# Altium PCB ZD-STM32-ZOUYU(remove layoout).PcbDoc (part 8 of 8)
Units mm, origin at the board's own origin, x right, y up, seen from the top; angles counter-clockwise.
Board outline 251.84 x 139.06 mm, 2 copper layers (Top Layer, Bottom Layer); 253 components, 246 nets, 1172 pads, 599 vias.
Unrouted connection lines stored in the file: 47.
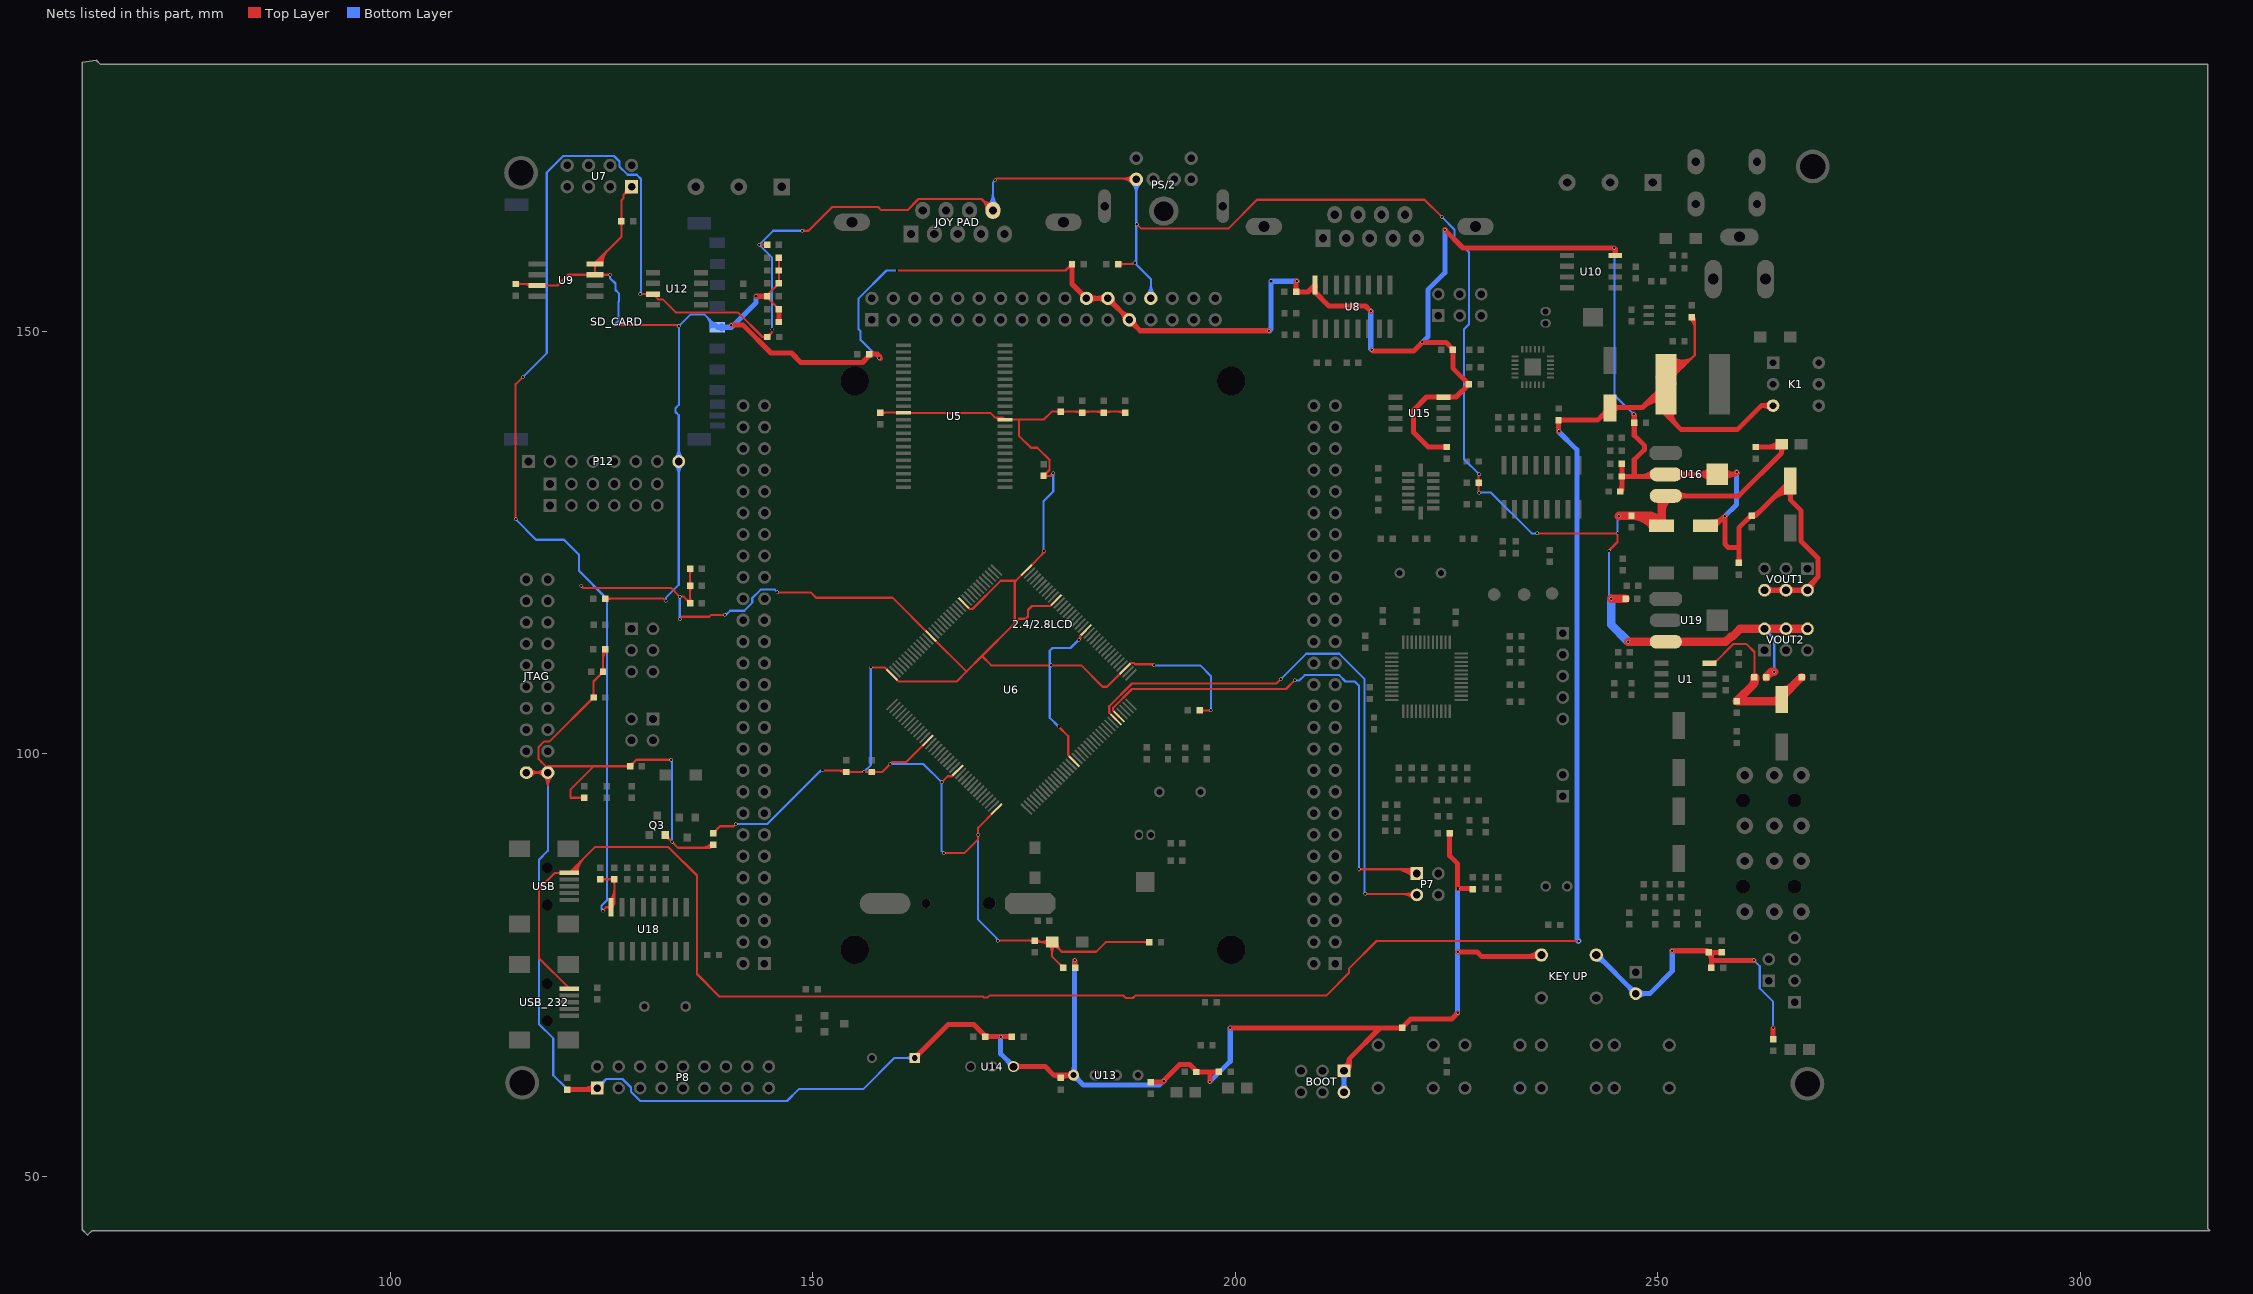
[diagram p8: the nets of this part, all layers, seen from the top]

## Via types
v1: diameter 0.4, hole 0.3, Top Layer to Bottom Layer, 598 vias
v2: diameter 0.3, hole 0.2, Top Layer to Bottom Layer, 1 vias

## Nets (pads, with @x,y where several pads share a name; then routed paths per layer and width w, separated by ;. In a path a pad name is that pad's centre, name@x,y a point inside that pad or via, vN(x,y) a via of type N, cw(c..) or ccw(c..) an arc to the next point about the centre after c; other vN are vias at no path point) (continued)
VCC3.3: 2.4/2.8LCD.22 2.4/2.8LCD.24 2.4/2.8LCD.25 "KEY UP.1" BEEP.1 BOOT.1 BOOT.2 C41.2 C43.1 C63.1 C64.1 C70.1 C71.1 C72.1 C73.2 C77.2 C78.2 C79.2 C80.2 C84.2 C85.1 D6.2 JTAG.1 JTAG.2 OLED.2 P8.1 P12.8 Q3.1 R14.2 R15.2 R16.2 R18.2 R32.2 R33.2 R34.1 R35.1 R36.1 R37.1 R38.1 R39.1 R43.2 R44.2 R46.2 R47.2 R49.1 R50.1 R51.1 R52.1 R53.1 R56.1 R57.2 R59.2 R61.2 R62.2 R63.2 R64.2 R68.1 SD_CARD.4 U7.2 U8.16 U9.3 U9.7 U9.8 U10.8 U13.1 U14.3 U15.8 U16.2 U16.4 VOUT1.2 VOUT1.4 VOUT1.6 | length 823.9
  Top Layer w0.254: C71.1@114.808,155.626 117.169,155.626 U9.3@117.348,155.446 119.759,155.446 121.031,156.718 U9.7@124.206,156.718 ; C71.1@114.988,155.446 cw(c115.421,155.013) 115.421,155.626 cw(c115.421,156.239) C71.1@114.988,155.805 ; 115.774,155.626 cw(c115.774,154.584) U9.3@116.511,155.321 ; JTAG.2@116.078,97.79 JTAG.1@118.618,97.79 118.357,98.051 118.357,98.559 117.729,99.187 ; JTAG.2@116.376,97.529 cw(c117.006,96.899) 117.006,97.79 cw(c117.006,98.681) JTAG.2@116.376,98.051 ; U9.3@116.388,155.626 cw(c116.388,155.197) U9.3@116.691,155.5 ; JTAG.2@116.556,97.349 cw(c117.619,96.286) 117.619,97.79 cw(c117.619,99.294) JTAG.2@116.556,98.231 ; 117.869,99.047 117.729,99.187 ; JTAG.1@118.14,97.349 ccw(c117.077,96.286) 117.077,97.79 ccw(c117.077,99.294) JTAG.1@118.14,98.231 ; JTAG.1@118.177,97.349 cw(c117.114,96.286) 118.618,96.286 cw(c120.122,96.286) JTAG.1@119.059,97.349 ; U9.3@118.185,155.321 cw(c118.488,155.017) 118.488,155.446 cw(c118.488,155.876) U9.3@118.185,155.572 ; JTAG.1@118.32,97.529 ccw(c117.69,96.899) 117.69,97.79 ccw(c117.69,98.681) JTAG.1@118.32,98.051 ; JTAG.1@118.357,97.529 cw(c117.727,96.899) 118.618,96.899 cw(c119.509,96.899) JTAG.1@118.879,97.529 ; 118.618,98.552 121.158,98.552 124.063,98.552 ; R56.1@122.756,94.639 ccw(c122.323,94.205) 122.323,94.818 ccw(c122.323,95.431) R56.1@122.756,94.998 ; R56.1@122.936,94.818 121.285,94.818 121.285,95.774 124.063,98.552 ; U9.7@123.369,156.592 ccw(c123.066,156.289) 123.066,156.718 ccw(c123.066,157.147) U9.7@123.369,156.844 ; R34.1@123.849,106.86 ccw(c123.415,107.293) 124.028,107.293 ccw(c124.641,107.293) R34.1@124.208,106.86 ; U9.7@124.08,156.844 ccw(c123.777,157.147) 124.206,157.147 ccw(c124.635,157.147) U9.7@124.332,156.844 ; U9.8@124.08,157.862 cw(c123.777,157.559) 124.206,157.559 cw(c124.635,157.559) U9.8@124.332,157.862 ; U9.8@124.333,157.988 cw(c124.946,157.988) 124.513,158.422 ; U9.8@124.587,157.988 cw(c125.813,157.988) 124.946,158.855 ; 124.691,109.243 ccw(c124.206,109.728) R35.1@124.892,109.728 ; 124.764,109.316 cw(c125.146,108.933) R35.1@125.146,109.474 ; U9.8@124.841,157.988 cw(c126.681,157.988) 125.38,159.289 ; R35.1@124.966,109.908 ccw(c124.533,110.341) 125.146,110.341 ccw(c125.759,110.341) R35.1@125.325,109.908 ; U9.7@125.043,156.592 cw(c125.346,156.289) 125.346,156.718 cw(c125.346,157.147) U9.7@125.043,156.844 ; U9.8@125.095,157.988 cw(c127.548,157.988) 125.813,159.722 ; 125.146,111.169 cw(c126.626,111.169) R36.1@125.579,112.215 ; 125.146,111.782 cw(c126.013,111.782) R36.1@125.4,112.395 125.146,112.141 R35.1@125.146,109.728 125.146,109.698 124.028,108.58 R34.1@124.028,106.68 118.832,101.484 118.212,101.484 117.504,100.776 117.504,99.412 117.729,99.187 ; R39.1@125.4,118.364 125.419,118.383 132.315,118.383 v1(132.588,118.11) ; R39.1@125.579,118.184 cw(c126.059,117.705) 126.059,118.383 ; R39.1@125.579,118.544 ccw(c125.967,118.931) 125.967,118.383 ; v1(125.984,156.718) U9.7@124.206,156.718 ; v1(126.492,150.775) 133.98,150.775 v1(134.131,150.624) ; C70.1@127.151,162.888 cw(c126.717,162.455) 127.33,162.455 cw(c127.943,162.455) C70.1@127.51,162.888 ; C70.1@127.151,163.248 ccw(c126.717,163.681) 127.33,163.681 ccw(c127.943,163.681) C70.1@127.51,163.248 ; U7.2@127.868,167.059 cw(c126.775,166.938) 127.552,166.16 ; U7.2@128.12,167.087 cw(c127.448,167.012) 127.926,166.534 cw(c128.404,166.056) U7.2@128.479,166.728 ; R68.1@128.167,98.372 ccw(c127.733,97.939) 127.733,98.552 ccw(c127.733,99.165) R68.1@128.167,98.732 ; R68.1@128.346,98.806 ccw(c128.346,99.419) 128.78,98.986 ccw(c129.213,98.552) R68.1@128.6,98.552 ; U7.2@128.451,166.476 ccw(c128.33,165.383) 127.552,166.16 ; U7.2@128.524,167.132 127.552,166.16 ; Q3.1@132.522,90.044 cw(c132.522,89.204) 133.116,89.798 ; Q3.1@132.522,90.392 v1(133.334,89.58) 134.014,88.9 137.846,88.9 R38.1@138.176,89.23 cw(c137.379,90.027) 137.379,88.9 ; Q3.1@132.845,90.367 ccw(c133.564,90.367) 133.056,89.858 ; v1(133.223,99.314) 129.108,99.314 R68.1@128.346,98.552 124.063,98.552 ; 133.591,150.775 cw(c133.591,150.084) v1@134.079,150.573 ; 136.766,88.9 ccw(c136.766,90.641) R38.1@137.996,89.41 ; R50.1@145.974,152.654 144.589,154.038 144.589,154.318 R51.1@145.974,155.702 R52.1@145.974,157.226 R53.1@145.974,158.75 ; v1(159.893,157.226) 179.894,157.226 C41.2@180.657,157.99 ; C41.2@180.403,157.99 cw(c179.79,157.99) 180.224,157.556 cw(c180.657,157.122) C41.2@180.657,157.736 ; U9.7@124.206,156.718 U9.8@124.206,157.988 124.206,158.115 127.33,161.239 C70.1@127.33,163.068 127.33,165.55 127.552,165.772 127.552,166.16
  Top Layer w0.6: C63.1@120.904,60.274 124.282,60.274 P8.1@124.46,60.452 ; 122.944,60.274 ccw(c122.944,61.968) P8.1@124.142,60.77 ; v1(140.335,150.749) 141.736,150.749 145.038,147.447 147.447,147.447 148.549,146.345 155.851,146.345 156.642,147.136 C43.1@156.642,147.32 157.607,147.32 157.861,147.066 ; v1(143.256,154.178) 144.588,154.178 C73.2@144.589,154.18 ; R49.1@145.974,151.13 R50.1@145.974,152.654 ; 156.373,146.867 ccw(c155.92,147.32) C43.1@156.561,147.32 ; 157.852,147.075 cw(c157.589,146.812) v1@157.961,146.812 ; BEEP.1@162.052,64.008 165.997,67.953 169.05,67.953 170.37,66.633 R63.2@170.37,66.546 v1(172.212,66.546) 173.542,66.546 C80.2@173.546,66.55 ; BEEP.1@162.052,64.308 ccw(c162.052,65.032) 162.564,64.52 ccw(c163.076,64.008) BEEP.1@162.352,64.008 ; U14.3@173.736,62.992 177.484,62.992 178.5,61.976 ; U14.3@173.983,62.745 cw(c174.581,62.147) 174.581,62.992 cw(c174.581,63.837) U14.3@173.983,63.239 ; C78.2@179.262,61.608 ccw(c178.5,61.003) 178.5,61.976 ; C78.2@179.383,61.601 cw(c180.288,60.696) U13.1@180.288,61.976 ; U13.1@180.601,61.729 ccw(c180.003,61.131) 180.003,61.976 ccw(c180.003,62.821) U13.1@180.601,62.223 ; C41.2@180.657,157.99 180.657,155.638 2.4/2.8LCD.22@182.372,153.924 2.4/2.8LCD.24@184.912,153.924 2.4/2.8LCD.25@187.452,151.384 188.739,150.097 203.945,150.097 v1(203.962,150.114) ; U13.1@180.848,61.976 178.5,61.976 ; v1(180.975,75.565) 181.026,75.514 R37.1@181.026,74.676 ; 2.4/2.8LCD.22@182.717,153.579 cw(c183.549,152.747) 183.549,153.924 cw(c183.549,155.101) 2.4/2.8LCD.22@182.717,154.269 ; 2.4/2.8LCD.24@184.567,153.579 ccw(c183.735,152.747) 183.735,153.924 ccw(c183.735,155.101) 2.4/2.8LCD.24@184.567,154.269 ; 2.4/2.8LCD.24@184.912,153.437 cw(c184.912,152.26) 185.744,153.092 cw(c186.576,153.924) 2.4/2.8LCD.24@185.399,153.924 ; 2.4/2.8LCD.25@186.965,151.384 ccw(c185.788,151.384) 186.62,152.216 ccw(c187.452,153.048) 2.4/2.8LCD.25@187.452,151.871 ; 2.4/2.8LCD.25@187.452,150.897 cw(c187.452,149.72) 188.284,150.552 cw(c189.116,151.384) 2.4/2.8LCD.25@187.939,151.384 ; R57.2@189.994,61.151 191.326,61.151 v1(191.516,61.341) 193.413,63.238 194.593,63.238 195.389,62.442 R43.2@195.389,62.355 196.85,62.355 ; 191.298,61.151 ccw(c191.298,61.559) v1@191.587,61.27 ; v1(196.977,61.214) 196.977,62.228 196.85,62.355 ; R44.2@198.056,62.359 198.053,62.355 196.85,62.355 ; v1@199.39,67.564 v1(199.392,67.566) 217.129,67.566 ; v1(207.264,155.956) 207.188,155.88 C64.1@207.188,154.686 208.601,154.686 U8.16@209.423,155.508 209.423,154.671 211.059,153.035 215.392,153.035 v1(216.027,152.4) ; 209.073,155.158 cw(c209.434,154.797) U8.16@209.495,155.304 ; BOOT.1@212.728,62.917 ccw(c212.439,63.924) 213.487,63.924 ; BOOT.1@212.852,62.484 213.487,63.119 213.487,63.924 ; BOOT.1@212.893,62.34 ccw(c212.668,63.128) BOOT.1@213.487,63.128 ; v1(216.154,147.828) 216.281,147.701 221.107,147.701 v1(222.115,148.709) 224.946,148.709 225.742,147.913 R62.2@225.742,147.826 225.742,145.671 R18.2@227.647,143.766 226.122,142.24 U15.8@224.648,142.24 222.631,142.24 221.107,140.716 221.107,138.049 222.821,136.334 R61.2@225.046,136.334 ; v1(224.79,162.052) 226.949,159.893 v1(244.856,159.893) ; R64.2@225.361,90.6 225.361,87.947 226.314,86.995 v1(226.314,84.074) 228.027,84.074 R33.2@228.09,84.01 ; v1(226.314,69.342) 225.573,68.601 220.726,68.601 219.773,67.649 R32.2@219.773,67.566 217.129,67.566 ; v1(226.314,76.581) 228.6,76.581 229.173,76.008 236.028,76.008 236.22,76.2 ; 234.58,76.008 ccw(c234.58,77.84) 235.875,76.545 ; 242.72,76.2 242.824,76.2 ; U10.8@244.968,159.004 v1@244.968,159.781 ; R16.2@245.497,131.12 ccw(c244.899,131.718) 245.745,131.718 ; R16.2@245.554,131.062 245.745,131.253 R15.2@245.745,132.842 ; R14.2@245.745,134.366 R15.2@245.745,132.842 ; v1(247.142,140.208) 247.218,140.132 C72.1@247.218,139.192 247.218,137.717 248.404,136.531 248.404,136.011 247.218,134.825 247.218,132.893 247.269,132.842 ; 247.991,132.842 ccw(c247.991,134.975) U16.2@249.499,133.467 ; v1(251.714,76.708) 255.84,76.708 R47.2@256.03,76.517 ; U16.2@252.401,132.724 cw(c253.299,131.827) 253.299,133.095 cw(c253.299,134.364) U16.2@252.401,133.467 ; 255.375,76.708 cw(c255.375,75.862) R47.2@255.973,76.46 ; D6.2@255.651,127 256.794,127 v1(257.937,128.143) 257.937,124.841 258.318,124.46 259.59,124.46 ; R47.2@255.977,76.457 cw(c255.252,75.633) 256.349,75.633 ; R59.2@256.349,74.678 256.349,75.692 ; U16.4@256.361,132.409 ccw(c254.705,130.753) 254.705,133.095 ccw(c254.705,135.437) U16.4@256.361,133.781 ; D6.2@256.401,127.45 ccw(c256.401,129.485) v1@257.84,128.046 ; C77.2@257.554,76.517 R47.2@256.03,76.517 ; U16.4@257.8,132.485 cw(c259.079,131.45) 259.079,133.095 ; U16.4@257.8,133.705 ccw(c259.079,134.74) 259.079,133.095 ; 258.96,133.095 ccw(c258.96,133.724) v1@259.405,133.279 ; v1(259.334,133.35) 259.079,133.095 ; C79.2@259.59,122.618 259.59,124.46 ; C84.2@261.114,128.288 ccw(c261.114,129.552) 262.008,128.658 ; v1(261.366,75.565) 256.476,75.565 256.349,75.692 ; VOUT1.6@262.636,119.38 VOUT1.4@265.176,119.38 VOUT1.2@267.716,119.38 267.716,119.713 268.966,120.963 268.966,123.17 266.934,125.202 266.934,128.84 265.684,130.09 C85.1@265.684,132.334 261.556,128.207 C84.2@261.114,128.207 261.027,128.207 259.59,126.769 259.59,124.46 ; VOUT1.6@262.954,119.062 cw(c263.722,118.294) 263.722,119.38 cw(c263.722,120.466) VOUT1.6@262.954,119.698 ; 263.465,130.115 cw(c265.684,127.896) C85.1@265.684,131.034 ; v1(263.652,67.564) 263.652,66.232 R46.2@263.654,66.23 ; 264.489,131.139 cw(c265.684,129.944) C85.1@265.684,131.634 ; VOUT1.4@264.858,119.062 ccw(c264.09,118.294) 264.09,119.38 ccw(c264.09,120.466) VOUT1.4@264.858,119.698 ; C85.1@265.366,131.166 cw(c264.598,130.398) 265.684,130.398 cw(c266.77,130.398) C85.1@266.002,131.166 ; VOUT1.4@265.494,119.062 cw(c266.262,118.294) 266.262,119.38 cw(c266.262,120.466) VOUT1.4@265.494,119.698 ; VOUT1.2@267.398,119.062 ccw(c266.63,118.294) 266.63,119.38 ccw(c266.63,120.466) VOUT1.2@267.398,119.698 ; VOUT1.2@268.166,119.38 cw(c270.056,119.38) 268.72,120.716 ; 213.487,63.924 217.129,67.566 ; R15.2@245.745,132.842 247.269,132.842 ; 247.269,132.842 250.697,132.842 U16.2@250.95,133.095 U16.4@257.046,133.095 259.079,133.095 ; R47.2@256.03,76.517 256.349,76.198 256.349,75.692
  Bottom Layer w0.254: JTAG.1@118.177,97.349 cw(c117.114,96.286) 118.618,96.286 cw(c120.122,96.286) JTAG.1@119.059,97.349 ; JTAG.1@118.357,97.529 cw(c117.727,96.899) 118.618,96.899 cw(c119.509,96.899) JTAG.1@118.879,97.529 ; JTAG.1@118.618,97.79 118.618,88.536 117.572,87.49 117.572,68.014 119.253,66.333 119.253,61.976 120.777,60.452 P8.1@124.46,60.452 125.537,61.529 127.446,61.529 128.463,60.512 128.463,60.006 129.548,58.921 146.932,58.921 148.336,60.325 155.956,60.325 159.639,64.008 BEEP.1@162.052,64.008 ; P8.1@124.019,60.011 ccw(c122.956,58.948) 122.956,60.452 ccw(c122.956,61.956) P8.1@124.019,60.893 ; P8.1@124.199,60.191 ccw(c123.569,59.561) 123.569,60.452 ccw(c123.569,61.343) P8.1@124.199,60.713 ; P8.1@124.46,60.821 ccw(c124.46,61.712) 125.09,61.082 ccw(c125.72,60.452) P8.1@124.829,60.452 ; P8.1@124.46,61.075 ccw(c124.46,62.579) 125.524,61.516 ccw(c126.587,60.452) P8.1@125.083,60.452 ; v1(125.984,156.718) 125.984,156.32 126.619,155.685 126.619,154.923 127.019,154.523 127.019,153.552 126.974,153.507 126.974,151.257 v1(126.492,150.775) v1@126.492,150.749 ; v1(132.588,118.11) 132.588,118.491 134.112,120.015 P12.8@134.112,134.62 134.112,140.098 133.731,140.479 133.731,140.915 134.131,141.315 v1(134.131,150.624) 135.545,152.038 137.142,152.038 SD_CARD.4@138.43,150.75 ; v1@133.171,99.262 cw(c132.778,98.869) 133.334,98.869 ; v1(133.223,99.314) 133.334,99.203 v1(133.334,89.58) ; P12.8@133.671,134.179 cw(c132.608,133.116) 134.112,133.116 cw(c135.616,133.116) P12.8@134.553,134.179 ; P12.8@133.671,135.061 ccw(c132.608,136.124) 134.112,136.124 ccw(c135.616,136.124) P12.8@134.553,135.061 ; P12.8@133.851,134.359 cw(c133.221,133.729) 134.112,133.729 cw(c135.003,133.729) P12.8@134.373,134.359 ; P12.8@133.851,134.881 ccw(c133.221,135.511) 134.112,135.511 ccw(c135.003,135.511) P12.8@134.373,134.881 ; 137.355,151.825 cw(c136.036,150.505) SD_CARD.4@137.902,150.505 ; 137.789,151.391 cw(c136.903,150.505) SD_CARD.4@138.156,150.505 ; SD_CARD.4@138.079,151.1 ccw(c138.375,151.396) SD_CARD.4@138.375,150.978 ; v1(157.861,146.812) 155.613,149.06 155.613,150.064 155.404,150.273 155.404,153.932 158.698,157.226 v1(159.893,157.226) ; BEEP.1@161.718,63.674 ccw(c160.91,62.866) 160.91,64.008 ccw(c160.91,65.15) BEEP.1@161.718,64.342 ; v1(244.856,159.893) 244.856,142.494 v1(247.142,140.208) ; v1(261.366,75.565) 262.067,74.864 262.067,72.267 263.652,70.682 v1(263.652,67.564)
  Bottom Layer w0.6: SD_CARD.4@138.43,150.75 SD_CARD.4@138.675,150.505 140.345,150.505 143.256,153.416 143.256,153.924 ; SD_CARD.4@139.187,150.293 cw(c139.699,149.781) 139.699,150.505 cw(c139.699,151.229) SD_CARD.4@139.187,150.717 ; 139.987,150.505 ccw(c139.987,151.097) v1@140.406,150.678 ; v1@140.335,150.649 ccw(c140.335,151.021) 140.598,150.758 ; v1(172.212,66.546) 172.212,64.516 U14.3@173.736,62.992 ; U14.3@173.386,62.992 ccw(c172.541,62.992) 173.139,63.589 ccw(c173.736,64.187) U14.3@173.736,63.342 ; U13.1@180.601,62.223 ccw(c179.696,63.128) 180.975,63.128 ; U13.1@180.848,61.626 cw(c180.848,60.781) 181.445,61.379 cw(c182.043,61.976) U13.1@181.198,61.976 ; v1(180.975,75.565) 180.975,62.103 U13.1@180.848,61.976 181.998,60.826 191.001,60.826 v1(191.516,61.341) ; v1(196.977,61.214) 199.392,63.629 v1(199.392,67.566) ; v1(203.962,150.114) 204.216,150.368 v1(204.216,155.956) v1(207.264,155.956) ; v1@204.033,150.043 ccw(c203.59,150.486) 204.216,150.486 ; BOOT.2@212.534,60.262 ccw(c211.766,61.03) 212.852,61.03 ccw(c213.938,61.03) BOOT.2@213.17,60.262 ; BOOT.1@212.534,62.166 cw(c211.766,61.398) 212.852,61.398 cw(c213.938,61.398) BOOT.1@213.17,62.166 ; BOOT.2@212.852,59.944 BOOT.1@212.852,62.484 ; v1(216.027,152.4) 216.027,147.955 v1(216.154,147.828) ; v1(222.115,148.709) 222.778,149.372 222.778,154.95 224.79,156.962 v1(224.79,162.052) ; v1@226.187,69.215 v1(226.314,69.342) v1(226.314,76.581) v1(226.314,84.074) ; 242.72,75.713 cw(c242.72,74.285) 243.73,75.294 ; 242.824,76.2 OLED.2@247.396,71.628 249.047,71.628 251.714,74.295 v1(251.714,76.708) ; 243.207,76.2 ccw(c244.133,76.2) 243.479,75.545 ; OLED.2@246.946,71.628 ccw(c245.86,71.628) 246.628,72.396 ccw(c247.396,73.164) OLED.2@247.396,72.078 ; OLED.2@247.714,71.31 cw(c248.482,70.542) 248.482,71.628 cw(c248.482,72.714) OLED.2@247.714,71.946 ; v1(257.937,128.143) 259.334,129.54 v1(259.334,133.35)
VCC3.3M: C39.2 C40.2 C52.1 C53.1 C54.1 C55.1 C56.1 C57.1 C58.1 C59.1 C60.1 C61.1 C62.1 D1.1 R30.2 R37.2 R38.2 U5.11 U5.33 U6.17 U6.39 U6.52 U6.62 U6.72 U6.84 U6.95 U6.108 U6.121 U6.131 U6.144 | length 353.7
  Top Layer w0.254: v1(122.555,119.888) 122.802,119.641 133.216,119.641 v1(134.239,118.618) 134.696,118.618 C60.1@135.458,117.856 C62.1@135.458,119.888 C61.1@135.458,121.92 ; v1(134.239,115.951) 134.526,116.238 137.735,116.238 137.956,116.459 v1(139.573,116.459) ; C60.1@135.204,117.856 ccw(c134.591,117.856) 135.025,118.29 ccw(c135.458,118.723) C60.1@135.458,118.11 ; C60.1@135.279,118.036 ccw(c134.845,118.469) 135.458,118.469 ccw(c136.071,118.469) C60.1@135.638,118.036 ; C62.1@135.279,119.708 cw(c134.845,119.275) 135.458,119.275 cw(c136.071,119.275) C62.1@135.638,119.708 ; C62.1@135.279,120.068 ccw(c134.845,120.501) 135.458,120.501 ccw(c136.071,120.501) C62.1@135.638,120.068 ; C61.1@135.279,121.74 cw(c134.845,121.307) 135.458,121.307 cw(c136.071,121.307) C61.1@135.638,121.74 ; R38.2@138.178,90.614 139.003,91.44 140.589,91.44 v1(140.843,91.694) ; R38.2@138.178,90.868 ccw(c138.178,91.482) 138.611,91.048 ccw(c139.045,90.614) R38.2@138.432,90.614 ; v1(145.796,119.126) 149.733,119.126 150.368,118.491 159.432,118.491 U6.95@163.952,113.971 168.14,109.783 168.203,109.783 ; v1(151.13,98.044) 153.746,98.044 C53.1@153.924,97.866 ; 152.882,98.044 cw(c152.882,96.824) C53.1@153.744,97.687 ; 153.495,98.044 cw(c153.495,97.437) C53.1@153.924,97.866 ; C53.1@154.104,97.687 cw(c154.537,97.253) 154.537,97.866 cw(c154.537,98.479) C53.1@154.104,98.046 ; 155.784,97.866 ccw(c155.784,98.216) v1@156.031,97.969 ; v1@156.135,97.969 ccw(c156.382,98.216) 156.382,97.866 ; C52.1@156.792,97.687 ccw(c156.359,97.253) 156.359,97.866 ccw(c156.359,98.479) C52.1@156.792,98.046 ; v1(156.845,110.236) 158.495,110.236 U6.108@159.356,109.375 160.165,108.566 166.986,108.566 168.203,109.783 ; C52.1@157.152,97.687 cw(c157.585,97.253) 157.585,97.866 cw(c157.585,98.479) C52.1@157.152,98.046 ; C39.2@157.99,140.398 160.702,140.398 U5.33@160.729,140.371 170.975,140.371 171.502,139.844 ; C39.2@158.169,140.219 cw(c158.603,139.785) 158.603,140.398 cw(c158.603,141.012) C39.2@158.169,140.578 ; 159.787,140.398 cw(c159.787,140.13) U5.33@159.977,140.32 ; U6.121@163.599,101.597 161.062,99.06 159.385,99.06 v1(159.131,98.806) 158.191,97.866 C52.1@156.972,97.866 C53.1@153.924,97.866 ; v1(165.227,96.647) 165.942,97.362 166.435,97.362 U6.131@167.134,98.061 ; v1(165.481,88.265) 167.894,88.265 169.545,89.916 v1(169.545,90.424) 169.545,91.28 U6.144@171.73,93.465 ; U6.84@167.841,117.86 168.541,117.161 168.877,117.161 172.221,120.505 174.022,120.505 ; v1(171.882,77.902) C54.1@176.276,77.902 ; 171.889,139.844 cw(c171.889,139.511) U5.11@172.195,139.643 ; U5.11@171.962,139.542 ccw(c171.502,139.343) 171.502,139.844 ; 172.276,139.844 cw(c172.276,139.678) U5.11@172.428,139.744 ; C54.1@176.096,77.722 ccw(c175.663,77.289) 175.663,77.902 ccw(c175.663,78.515) C54.1@176.096,78.081 ; C54.1@176.456,78.081 ccw(c177.318,78.944) 177.318,77.724 ; 176.705,77.724 cw(c176.705,78.331) C54.1@176.276,77.902 ; 176.953,123.436 ccw(c176.31,124.079) v1@177.219,124.079 ; R30.2@177.29,133.16 ccw(c177.29,133.773) 177.724,133.339 ccw(c178.158,132.905) R30.2@177.544,132.905 ; 177.386,123.87 ccw(c177.177,124.079) v1@177.473,124.079 ; 177.444,123.927 U6.72@175.266,121.749 174.022,120.505 ; R30.2@177.47,132.726 cw(c177.904,132.292) 177.904,132.905 cw(c177.904,133.519) R30.2@177.47,133.085 ; D1.1@177.838,77.354 ccw(c176.945,76.461) 176.945,77.724 ccw(c176.945,78.987) D1.1@177.838,78.094 ; D1.1@177.938,77.354 cw(c177.045,76.461) 178.308,76.461 cw(c179.571,76.461) D1.1@178.678,77.354 ; D1.1@178.408,77.201 cw(c178.408,76.18) 179.13,76.902 ; v1(178.435,133.223) 178.118,132.905 R30.2@177.29,132.905 178,133.615 178,134.806 176.554,136.252 175.804,136.252 174.371,137.685 174.371,139.571 ; D1.1@178.677,77.724 ccw(c179.568,77.724) D1.1@178.938,77.094 ; U6.62@178.801,118.214 178.102,117.514 175.934,117.514 175.46,117.04 175.46,116.271 175.194,116.005 174.425,116.005 173.882,115.462 ; D1.1@178.931,77.724 ccw(c180.435,77.724) 179.372,76.66 ; v1@179.07,103.378 v1(179.07,103.251) 180.213,102.108 180.213,100.2 180.223,100.19 180.223,99.887 180.923,99.187 U6.17@180.923,99.122 ; C40.2@179.143,140.346 ccw(c178.709,139.912) 178.709,140.525 ccw(c178.709,141.139) C40.2@179.143,140.705 ; R37.2@179.387,74.678 ccw(c178.774,74.678) 179.208,75.111 ccw(c179.641,75.545) R37.2@179.641,74.932 ; C40.2@179.502,140.346 cw(c179.936,139.912) 179.936,140.525 cw(c179.936,141.139) C40.2@179.502,140.705 ; R37.2@179.641,74.678 178.308,76.011 D1.1@178.308,77.724 ; 180.975,140.525 cw(c180.975,139.522) C59.1@181.684,140.232 ; v1@181.441,113.597 ccw(c181.17,113.979) 181.637,113.979 ; v1(181.483,113.538) 181.637,113.692 181.637,113.979 ; 181.637,113.915 cw(c181.867,113.915) U6.52@181.79,114.132 ; C59.1@182.044,140.232 cw(c182.753,139.522) 182.753,140.525 ; U6.52@182.337,114.678 181.637,113.979 ; 183.515,140.525 cw(c183.515,139.522) C58.1@184.224,140.232 ; C58.1@184.584,140.232 cw(c185.293,139.522) 185.293,140.525 ; 186.055,140.525 cw(c186.055,139.522) C57.1@186.764,140.232 ; C57.1@186.944,140.411 186.83,140.525 184.404,140.525 C40.2@179.322,140.525 178.244,140.525 177.29,139.571 174.371,139.571 ; C55.1@189.635,77.544 ccw(c189.201,77.111) 189.201,77.724 ccw(c189.201,78.337) C55.1@189.635,77.904 ; C55.1@189.814,77.724 184.658,77.724 183.515,76.581 179.451,76.581 D1.1@178.308,77.724 ; 189.89,110.617 cw(c189.89,110.007) v1@190.321,110.438 ; v1(190.373,110.49) 190.246,110.617 188.134,110.617 187.969,110.782 187.698,110.782 186.998,110.082 U6.39@186.933,110.082 184.801,107.95 184.277,107.95 181.737,110.49 v1(178.181,110.49) 171.101,110.49 170.005,111.585 ; C56.1@195.758,105.156 v1(197.104,105.156) ; C56.1@195.937,104.976 cw(c196.371,104.543) 196.371,105.156 cw(c196.371,105.769) C56.1@195.937,105.336 ; 168.203,109.783 170.005,111.585 ; 170.005,111.585 173.882,115.462 ; 171.502,139.844 172.456,139.844 U5.11@172.729,139.571 174.371,139.571 ; 173.882,115.462 173.882,120.365 174.022,120.505 ; C54.1@176.276,77.902 176.454,77.724 D1.1@178.308,77.724
  Bottom Layer w0.254: v1(134.239,115.951) v1(134.239,118.618) ; v1(139.573,116.459) 139.7,116.459 140.19,116.949 141.857,116.949 142.821,117.913 142.821,118.453 143.821,119.453 145.469,119.453 v1(145.796,119.126) ; v1@139.573,116.532 ccw(c139.573,117.015) 139.914,116.673 ; v1(140.843,91.694) 144.556,91.694 150.906,98.044 v1(151.13,98.044) ; 150.624,97.761 cw(c151.13,97.255) v1@151.13,97.971 ; v1(156.083,97.917) 156.845,98.679 v1(156.845,110.236) ; v1(159.131,98.806) 163.068,98.806 v1(165.227,96.647) 165.227,88.519 v1(165.481,88.265) ; v1(169.545,90.424) 169.545,80.391 171.882,78.054 v1(171.882,77.902) ; 171.649,78.287 cw(c171.265,77.902) v1@171.809,77.902 ; v1(177.292,124.079) 177.292,129.921 178.435,131.064 v1(178.435,133.223) ; 178.035,109.961 cw(c178.71,109.961) v1@178.233,110.438 ; 178.035,111.019 ccw(c178.71,111.019) v1@178.233,110.542 ; v1(179.07,103.251) 178.035,104.286 178.035,112.232 178.344,112.541 180.486,112.541 v1(181.483,113.538) ; v1(190.373,110.49) 195.834,110.49 197.104,109.22 v1(197.104,105.156)
VCC5: 2.4/2.8LCD.28 "JOY PAD.9" C42.2 C68.2 C76.1 C86.2 C91.1 C92.1 C95.2 C97.2 D5.2 F1.1 PS/2.4 R3.2 R7.2 U12.3 U16.3 U18.16 U19.3 VOUT2.2 VOUT2.4 VOUT2.6 | length 444.4
  Top Layer w0.254: v1(114.808,127.762) 114.808,133.54 114.801,133.547 114.801,143.757 v1(115.644,144.6) ; C91.1@124.841,85.166 C92.1@126.492,85.166 126.492,82.229 U18.16@126.111,81.848 125.536,81.848 v1(125.095,81.407) ; C91.1@125.021,84.987 cw(c125.454,84.553) 125.454,85.166 cw(c125.454,85.779) C91.1@125.021,85.346 ; U18.16@125.989,81.726 ccw(c125.693,81.43) 125.693,81.848 ccw(c125.693,82.266) U18.16@125.989,81.97 ; U18.16@125.989,82.77 ccw(c124.774,83.985) 126.492,83.985 ; U18.16@126.111,82.021 ccw(c126.111,82.439) 126.406,82.143 ccw(c126.702,81.848) U18.16@126.284,81.848 ; U18.16@126.168,82.591 ccw(c125.387,83.372) 126.492,83.372 ; C92.1@126.312,85.346 cw(c125.879,85.779) 125.879,85.166 cw(c125.879,84.553) 126.312,84.987 cw(c125.879,84.553) 126.492,84.553 cw(c127.105,84.553) C92.1@126.672,84.987 ; U18.16@126.348,82.411 ccw(c126,82.759) 126.492,82.759 ; v1(129.54,154.432) U12.3@131.064,154.432 131.69,153.806 132.216,153.806 133.75,152.273 141.099,152.273 144.02,149.352 ; U12.3@130.421,154.297 ccw(c130.096,153.972) 130.096,154.432 ccw(c130.096,154.892) U12.3@130.421,154.567 ; v1(143.637,160.274) 143.639,160.276 C68.2@144.589,160.276 ; C68.2@144.41,160.096 ccw(c143.976,159.662) 143.976,160.276 ccw(c143.976,160.889) C68.2@144.41,160.455 ; C76.1@144.416,149.179 ccw(c144.02,148.811) 144.02,149.352 ; C76.1@144.416,149.525 cw(c144.02,149.893) 144.02,149.352 ; C76.1@144.602,149.606 ccw(c144.602,150.219) 145.036,149.786 ccw(c145.469,149.352) C76.1@144.856,149.352 ; v1(145.161,150.241) 145.161,149.911 C76.1@144.602,149.352 144.02,149.352 ; v1(148.717,161.925) 149.479,161.925 152.292,164.738 157.725,164.738 158.09,164.373 161.18,164.373 162.488,165.681 169.955,165.681 171.298,164.338 ; 170.018,165.617 ccw(c171.008,166.607) 171.195,165.22 ; 170.087,165.549 cw(c169.003,164.465) 170.536,164.465 ; 170.381,165.255 ccw(c171.094,165.968) 171.23,164.968 ; 170.52,165.115 cw(c169.87,164.465) 170.79,164.465 ; v1(171.577,167.894) 171.81,168.127 188.151,168.127 PS/2.4@188.266,168.012 ; C42.2@186.118,157.986 187.958,157.986 v1(188.087,158.115) ; C42.2@186.298,157.807 cw(c186.732,157.373) 186.732,157.986 cw(c186.732,158.6) C42.2@186.298,158.166 ; 186.364,168.127 cw(c186.364,166.11) PS/2.4@187.79,167.536 ; 186.919,168.127 ccw(c186.919,169.359) PS/2.4@187.79,168.488 ; 186.977,168.127 cw(c186.977,166.723) PS/2.4@187.97,167.716 ; 187.6,157.986 ccw(c187.6,158.602) v1@188.035,158.167 ; v1(188.341,162.687) 188.843,162.185 199.142,162.185 202.565,165.608 222.377,165.608 v1(224.409,163.576) ; R3.2@228.611,131.899 cw(c228.177,131.465) 228.79,131.465 cw(c229.404,131.465) R3.2@228.97,131.899 ; R3.2@228.611,132.258 ccw(c228.177,132.692) 228.79,132.692 ccw(c229.404,132.692) R3.2@228.97,132.258 ; 228.79,131.267 ccw(c229.184,131.267) v1@228.906,130.989 ; 228.79,132.766 cw(c229.184,132.766) v1@228.906,133.044 ; v1@228.79,133.032 R3.2@228.79,132.078 228.79,131 v1(228.854,130.937) ; v1(235.712,126.111) v1(245.237,126.111) 245.237,125.095 v1(244.221,124.079)
  Top Layer w0.6: U16.3@250.95,130.555 259.587,130.555 264.668,135.636 F1.1@264.668,136.652 264.351,136.334 C97.2@261.622,136.334 ; U16.3@252.401,130.184 cw(c253.299,129.287) 253.299,130.555 cw(c253.299,131.824) U16.3@252.401,130.927 ; 262.966,136.334 ccw(c262.966,138.227) F1.1@264.304,136.889 ; F1.1@264.431,136.415 cw(c263.859,135.843) 264.668,135.843 cw(c265.477,135.843) F1.1@264.905,136.415
  Top Layer w1: v1(244.475,118.364) 244.477,118.366 C95.2@246.189,118.366 ; v1(245.364,128.143) 245.427,128.207 C86.2@246.89,128.207 ; v1(246.507,113.284) U19.3@250.95,113.283 258.036,113.283 258.61,113.857 258.764,113.857 259.715,114.808 VOUT2.2@262.636,114.808 VOUT2.4@265.176,114.808 VOUT2.6@267.716,114.808 ; 248.815,128.207 cw(c248.815,126.382) D5.2@250.308,127.431 ; D5.2@249.489,126.856 ccw(c246.89,125.029) C86.2@246.89,128.207 ; 250.444,128.547 cw(c252.959,128.547) U16.3@251.181,130.325 ; U16.3@250.95,130.555 250.444,130.049 D5.2@250.444,127 249.237,128.207 C86.2@246.89,128.207 ; R7.2@262.827,109.091 263.463,109.728 v1(263.779,109.728)
  Bottom Layer w0.254: v1(114.808,127.762) 117.221,125.349 120.523,125.349 122.301,123.571 122.301,121.666 125.622,118.345 125.622,82.696 124.968,82.042 124.968,81.661 ; v1@115.57,144.526 v1(115.644,144.6) 118.491,147.447 118.491,168.835 120.442,170.786 126.446,170.786 127.098,170.134 127.098,169.522 128.062,168.558 129.136,168.558 129.638,168.055 129.638,154.53 v1(129.54,154.432) ; 124.968,81.89 ccw(c125.578,81.89) v1@125.147,81.459 ; v1@129.488,154.484 ccw(c129.126,154.846) 129.638,154.846 ; v1(145.161,150.241) 145.161,158.75 v1(143.637,160.274) 145.288,161.925 v1(148.717,161.925) ; 170.759,165.004 ccw(c169.458,166.305) 171.298,166.305 ccw(c173.137,166.305) 171.836,165.004 ; 170.938,164.824 ccw(c170.071,165.691) 171.298,165.691 ccw(c172.524,165.691) 171.657,164.824 ; 171.298,164.338 171.298,167.615 v1(171.577,167.894) ; PS/2.4@187.79,167.536 cw(c186.641,166.387) 188.266,166.387 cw(c189.891,166.387) PS/2.4@188.742,167.536 ; PS/2.4@187.97,167.716 cw(c187.254,167) 188.266,167 cw(c189.278,167) PS/2.4@188.562,167.716 ; v1@188.035,158.167 ccw(c187.479,158.723) 188.266,158.723 ; v1(188.087,158.115) v1@188.214,157.988 ; 188.266,162.33 cw(c188.698,162.33) v1@188.393,162.635 ; 188.266,163.044 ccw(c188.698,163.044) v1@188.393,162.739 ; PS/2.4@188.266,168.012 188.266,158.04 v1@188.214,157.988 ; 2.4/2.8LCD.28@189.525,154.391 ccw(c188.398,155.518) 189.992,155.518 ccw(c191.586,155.518) 2.4/2.8LCD.28@190.459,154.391 ; 2.4/2.8LCD.28@189.705,154.211 ccw(c189.011,154.905) 189.992,154.905 ccw(c190.973,154.905) 2.4/2.8LCD.28@190.279,154.211 ; 2.4/2.8LCD.28@189.992,153.924 189.992,156.21 v1@188.214,157.988 ; v1(224.409,163.576) 225.936,162.049 225.936,161.09 227.645,159.381 227.645,150.858 227.057,150.27 227.057,134.893 v1(228.854,133.096) ; v1(228.854,130.937) 230.251,130.937 235.077,126.111 v1(235.712,126.111) v1@235.839,126.111 ; v1(244.221,124.079) 244.221,118.618 v1(244.475,118.364) ; v1(245.237,126.111) 245.237,128.016 v1(245.364,128.143) ; 245.237,127.66 cw(c245.847,127.66) v1@245.416,128.091
  Bottom Layer w0.3: VOUT2.2@262.636,114.808 263.779,113.665 v1(263.779,109.728)
  Bottom Layer w1: v1(244.475,118.364) 244.475,115.316 v1(246.507,113.284)
VDDA: 
VDDAMP: C9.1 C10.2 R6.2 R7.1 U1.8 | length 27.7
  Top Layer w0.254: U1.8@256.144,110.744 256.667,110.744 258.953,113.03 260.477,113.03 261.442,112.065 R7.1@261.442,109.093 ; U1.8@256.652,110.934 ccw(c256.652,111.43) 257.002,111.08 ; U1.8@256.842,110.744 cw(c257.267,110.744) U1.8@256.967,111.044 ; R7.1@261.263,109.273 ccw(c260.829,109.706) 261.442,109.706 ccw(c262.055,109.706) R7.1@261.622,109.273
  Top Layer w1: 261.114,108.014 ccw(c260.036,109.093) R7.1@261.561,109.093 ; R7.1@261.442,109.093 261.442,108.342 R6.2@259.336,106.236 264.477,106.236 C9.1@264.668,106.426 264.668,106.745 C10.2@267.017,109.095 ; 263.605,106.236 ccw(c263.605,107.489) C9.1@264.491,106.603 ; C9.1@264.668,107.526 ccw(c264.668,109.411) 266.001,108.078
VREF+: P7.1 U6.32 | length 68.7
  Top Layer w0.254: U6.32@186.226,104.425 185.526,105.125 185.526,105.461 187.761,107.696 205.994,107.696 v1(207.01,108.712) ; v1(214.63,86.36) 220.98,86.36 P7.1@221.488,85.852 ; 218.758,86.36 cw(c218.758,83.122) P7.1@221.047,85.411 ; 219.371,86.36 cw(c219.371,83.735) P7.1@221.227,85.591 ; 219.984,86.36 cw(c219.984,84.348) P7.1@221.407,85.771 ; 220.597,86.36 cw(c220.597,84.961) P7.1@221.586,85.95
  Bottom Layer w0.254: v1(207.01,108.712) 207.589,108.712 208.206,109.329 211.836,109.329 212.287,109.329 213.031,108.585 214.122,108.585 214.63,108.077 v1(214.63,86.36) v1@214.63,86.233
VREF-: P7.3 U6.31 | length 71.4
  Top Layer w0.254: U6.31@185.873,104.072 185.072,104.872 185.072,105.649 187.754,108.331 204.851,108.331 v1(205.359,108.839) ; v1(215.392,83.439) 221.361,83.439 P7.3@221.488,83.312 ; 219.677,83.439 cw(c219.677,81.501) P7.3@221.047,82.871 ; P7.3@221.047,83.753 cw(c220.291,84.509) 220.291,83.439 cw(c220.291,82.115) P7.3@221.227,83.051
  Bottom Layer w0.254: v1(205.359,108.839) 208.389,111.869 212.287,111.869 215.265,108.891 215.265,83.566 v1(215.392,83.439) ; 215.265,83.922 ccw(c215.875,83.922) v1@215.444,83.491
"VS XCS": 
"VS XDCS": 
VUSB: C87.2 C88.1 K1.3 L1.1 R67.1 USB.1 USB_232.1 | length 323.3
  Top Layer w0.254: USB.1@121.141,85.928 cw(c121.158,85.928) USB.1@121.146,85.94 ; USB.1@121.395,85.928 cw(c122.025,85.928) 121.58,86.374 ; USB_232.1@121.488,72.212 USB_232.1@121.134,72.212 121.134,72.25 117.572,75.812 117.572,84.027 119.473,85.928 USB.1@121.134,85.928 124.179,88.973 132.903,88.973 136.271,85.605 136.271,73.951 138.944,71.278 170.109,71.278 170.236,71.151 170.632,71.151 170.909,71.428 186.708,71.428 187.027,71.109 187.877,71.109 188.196,71.428 210.803,71.428 213.44,74.065 213.44,74.58 216.71,77.851 v1(240.665,77.851) ; USB.1@121.649,85.928 cw(c122.892,85.928) 122.013,86.807 ; USB.1@121.903,85.928 cw(c123.76,85.928) 122.447,87.241 ; USB.1@122.157,85.928 cw(c124.627,85.928) 122.88,87.674 ; L1.1@249.786,144.582 ccw(c250.768,145.872) L1.1@251.914,144.726 ; L1.1@249.94,144.784 ccw(c250.945,146.105) L1.1@252.119,144.931 ; L1.1@250.094,144.987 ccw(c251.123,146.339) 252.325,145.137 ; L1.1@250.248,145.189 ccw(c251.301,146.572) 252.531,145.343 ; L1.1@250.401,145.391 ccw(c251.479,146.806) 252.736,145.548 ; L1.1@250.555,145.593 ccw(c251.656,147.039) 252.942,145.754 ; L1.1@250.709,145.795 ccw(c251.834,147.273) 253.147,145.959 ; L1.1@250.863,145.997 ccw(c252.012,147.506) 253.353,146.165 ; L1.1@250.952,143.764 254.381,147.193 ; L1.1@251.017,146.199 ccw(c252.19,147.74) 253.559,146.371 ; L1.1@251.171,146.401 ccw(c252.367,147.973) 253.764,146.576 ; L1.1@251.325,146.603 ccw(c252.545,148.207) 253.97,146.782 ; L1.1@251.478,146.805 ccw(c252.723,148.44) 254.175,146.987 ; L1.1@251.632,147.008 ccw(c252.9,148.673) 254.381,147.193 ; R67.1@253.82,151.535 cw(c252.467,150.181) 254.381,150.181 ; R67.1@254.18,151.894 cw(c253.693,151.408) 254.381,151.408 ; 254.381,150.794 ccw(c253.08,150.794) R67.1@254,151.714 254.381,151.333 254.381,147.193
  Top Layer w0.6: v1(238.25,138.178) C87.2@238.25,139.51 242.887,139.51 C88.1@244.348,140.97 244.386,141.008 248.196,141.008 L1.1@250.952,143.764 250.952,140.208 252.73,138.43 259.461,138.43 262.255,141.224 K1.3@263.652,141.224 ; 243.296,139.918 cw(c244.178,139.037) C88.1@244.371,140.268 ; C88.1@244.666,140.652 cw(c245.526,139.792) 245.526,141.008 ; C88.1@244.666,141.288 ccw(c245.343,141.965) 245.343,141.008 ; 248.287,141.099 cw(c250.075,139.312) L1.1@251.048,141.645 ; 248.92,141.732 cw(c250.448,140.205) L1.1@251.279,142.198 ; 249.554,142.366 cw(c250.82,141.099) L1.1@251.51,142.752 ; L1.1@250.187,142.999 cw(c251.193,141.992) L1.1@251.742,143.306 ; L1.1@250.82,143.632 cw(c251.566,142.886) L1.1@251.973,143.86 ; L1.1@251.266,141.259 ccw(c252.54,140.63) 251.535,139.625 ; L1.1@251.804,140.993 ccw(c253.332,140.239) 252.127,139.033 ; K1.3@263.334,140.906 ccw(c262.566,140.138) 262.566,141.224 ccw(c262.566,142.31) K1.3@263.334,141.542
  Bottom Layer w0.6: v1(238.25,138.178) 240.414,136.014 240.414,78.102 v1(240.665,77.851) ; 240.414,78.216 ccw(c241.03,78.216) v1@240.594,77.78
pads on no net: 2.4/2.8LCD. 2.4/2.8LCD.32 "JOY PAD.0" "JOY PAD.1" "JOY PAD.5" BAT.0 COM.0 COM.1 COM.4 COM.5 COM.6 COM.7 COM.8 COM.9 JTAG.11 JTAG.17 JTAG.19 K1.1 K1.4 K1.5 K1.6 LINE_IN.0 PHONE.0 PS/2.2 PS/2.6 PS/2.7 PS/2.9 PS/2.S SD_CARD.10 SD_CARD.11 SD_CARD.12 U3.9 U3.10 U3.15 U3.27 U4.0 U4.8 U4.19 U4.20 U4.21 U4.22 U4.23 U6.106 U8.7 U8.8 U8.9 U8.10 U11.3 U11.9 U11.11 U12.5 U18.9 U18.10 U18.11 U18.12 U18.15 USB.4 USB.6 USB.7 USB.8 USB.9 USB.MH1 USB.MH2 USB_232.4 USB_232.6 USB_232.7 USB_232.8 USB_232.9 USB_232.MH1 USB_232.MH2 Y2. Y3.
copper on no net: | length 0
  Top Layer w0.254: 160.031,110.05 160.063,110.082

## Keep-outs
Keep-Out Layer:
  lines w0.6: 112.395,58.039 112.395,172.212 270.891,172.212 270.891,58.039 112.395,58.039

## Silkscreen, mask and mechanical layers (free items; w line width, h text height)
Top Overlay:
  text "485A" at 237.744,161.925 h1
  text "GND" at 243.332,161.925 h1
  text "485B" at 247.65,161.925 h1
  text "CANH" at 134.366,161.163 h1
  text "GND" at 140.081,161.163 h1
  text "CANL" at 145.161,161.163 h1
  text "TFT LCD" at 176.149,145.288 h3
  text "PB10" at 203.835,140.97 h1
  text "PB12" at 136.017,140.843 h1
  text "PB13" at 145.923,140.843 h1
  text "PB11" at 213.741,140.843 h1
  text "PE15" at 213.868,138.176 h1
  text "PB15" at 146.05,138.049 h1
  text "PE14" at 203.835,138.049 h1
  text "PB14" at 136.144,137.922 h1
  text "PE13" at 213.868,135.89 h1
  text "PD8" at 136.144,135.636 h1
  text "PD9" at 146.177,135.636 h1
  text "PE12" at 203.708,135.636 h1
  text "PD10" at 136.144,133.223 h1
  text "PE10" at 203.581,133.223 h1
  text "PD11" at 146.177,133.096 h1
  text "PE11" at 213.868,133.096 h1
  text "PD12" at 136.017,130.683 h1
  text "PE8" at 203.708,130.683 h1
  text "PD13" at 146.177,130.556 h1
  text "PE9" at 213.741,130.556 h1
  text "PD14" at 136.017,128.27 h1
  text "PG1" at 203.708,128.016 h1
  text "PD15" at 146.304,127.889 h1
  text "PE7" at 213.614,127.889 h1
  text "PG0" at 213.614,125.73 h1
  text "PG2" at 136.017,125.603 h1
  text "PF15" at 203.581,125.476 h1
  text "PG3" at 146.431,125.349 h1
  text "GND" at 259.842,123.698 h1
  text "PG4" at 136.017,123.063 h1
  text "PF13" at 203.581,122.809 h1
  text "PG5" at 146.431,122.682 h1
  text "PF14" at 213.741,122.428 h1
  text "PG7" at 146.431,120.396 h1
  text "PF11" at 203.327,120.396 h1
  text "PF12" at 213.741,120.142 h1
  text "PG6" at 139.446,119.888 h1 r90
  text "VCC3.3" at 254.762,119.38 h1
  text "PB2" at 213.614,117.983 h1
  text "PC6" at 146.304,117.856 h1
  text "PB1" at 203.327,117.856 h1
  text "PG8" at 139.319,116.713 h1 r90
  text "CRX" at 126.111,116.459 h0.6
  text "PB0" at 213.614,115.443 h1
  text "PC8" at 146.431,115.316 h1
  text "PC5" at 203.327,115.316 h1
  text "PC7" at 136.017,115.062 h1
  text "CTX" at 132.715,114.427 h1
  text "VCC5" at 260.731,113.792 h1 r90
  text "PC9" at 135.89,113.03 h1
  text "PA8" at 146.431,112.903 h1
  text "PC4" at 213.487,112.903 h0.5
  text "PA7" at 203.327,112.776 h1
  text "PA12" at 132.842,112.014 h0.6
  text "PA11" at 126.873,111.125 h0.6 r90
  text "PA11" at 135.89,110.49 h1
  text "PA6" at 213.487,110.363 h0.5
  text "PA12" at 146.431,110.236 h1
  text "PA5" at 203.2,110.236 h1
  text "GND" at 264.414,109.728 h1
  text "D+" at 132.842,108.585 h0.6
  text "PA14" at 146.431,107.823 h1
  text "PA4" at 213.487,107.823 h0.5
  text "PA13" at 135.89,107.696 h1
  text "PA3" at 203.2,107.696 h1
  text "D-" at 126.492,107.315 h0.6
  text "PA1" at 203.2,105.283 h1
  text "PA15" at 135.89,105.156 h1
  text "PC10" at 146.431,105.156 h1
  text "PA2" at 213.487,105.029 h0.5
  text "PA10" at 133.096,103.886 h0.6
  text "PA9" at 124.968,103.759 h0.6
  text "PC12" at 146.304,102.743 h1
  text "PA0" at 213.36,102.743 h1
  text "PC11" at 136.017,102.616 h1
  text "PC3" at 203.2,102.489 h1
  text "RXD" at 124.587,100.838 h0.6
  text "TXD" at 133.096,100.711 h0.6
  text "PC1" at 203.2,100.203 h1
  text "PC2" at 213.614,100.203 h1
  text "PD0" at 136.144,99.949 h1
  text "PD1" at 146.304,99.949 h1
  text "PD2" at 137.16,97.536 h1
  text "PF10" at 203.2,97.536 h1
  text "PC0" at 213.614,97.536 h1
  text "PD3" at 146.304,97.409 h1
  text "PF9" at 213.741,95.25 h1
  text "PF8" at 203.2,94.996 h1
  text "PD4" at 136.144,94.869 h1
  text "PD5" at 146.177,94.869 h1
  text "PF7" at 213.741,92.71 h1
  text "PD6" at 137.033,92.583 h1
  text "PF6" at 203.327,92.456 h1
  text "PD7" at 146.177,92.329 h1
  text "PG10" at 146.05,90.043 h1
  text "PF5" at 213.741,90.043 h1
  text "PF4" at 203.454,89.789 h1
  text "PG9" at 139.954,89.281 h1 r90
  text "PG12" at 146.05,87.63 h1
  text "PF3" at 213.868,87.503 h1
  text "PF2" at 203.581,87.376 h1
  text "PG11" at 139.954,85.725 h1 r90
  text "PG14" at 146.177,85.09 h1
  text "PF1" at 213.741,84.836 h1
  text "PF0" at 203.581,84.709 h1
  text "PG13" at 136.271,84.328 h1
  text "PB3" at 146.177,82.55 h1
  text "PC13" at 213.741,82.55 h1
  text "PG15" at 136.144,82.423 h1
  text "PE6" at 203.581,82.423 h1
  text "PB4" at 136.144,80.137 h1
  text "PE4" at 203.581,80.01 h1
  text "PB5" at 146.05,79.883 h1
  text "PE5" at 213.741,79.883 h1
  text "GND" at 268.097,77.597 h0.6
  text "PB6" at 136.144,77.47 h1
  text "PB7" at 146.05,77.343 h1
  text "PE2" at 203.708,77.216 h1
  text "PE3" at 213.741,77.089 h1
  text "DAC" at 268.097,75.565 h0.6
  text "AIN" at 259.969,75.438 h0.6
  text "PE0" at 203.835,74.803 h1
  text "PB9" at 146.177,74.676 h1
  text "PE1" at 213.741,74.676 h1
  text "PB8" at 136.271,74.168 h1
  text "ADC" at 268.097,73.152 h0.6
  text "PDC" at 259.588,72.644 h0.6
  text "TPAD" at 267.843,70.231 h0.6
  text "QQ:1746430162" at 181.61,68.58 h1
  text "TEL:15871766724" at 180.467,66.421 h1

## Text inside footprints (layer, text, board x,y; h text height)
2.4/2.8LCD: Top Overlay "D16" at 180.741,156.281 h0.82 r180; Top Overlay "RS" at 157.491,156.281 h0.82 r180; Top Overlay "D3" at 165.241,156.281 h0.82 r180; Top Overlay "D5" at 167.866,156.281 h0.82 r180; Top Overlay "D7" at 170.366,156.281 h0.82 r180; Top Overlay "D10" at 173.116,156.281 h0.82 r180; Top Overlay "D14" at 178.241,156.281 h0.82 r180; Top Overlay "V5" at 190.616,156.281 h0.82 r180; Top Overlay "GND" at 188.616,156.281 h0.82 r180; Top Overlay "VDD" at 185.991,156.281 h0.82 r180; Top Overlay "D12" at 175.741,156.281 h0.82 r180; Top Overlay "D1" at 162.616,156.281 h0.82 r180; Top Overlay "RD" at 160.241,156.281 h0.82 r180; Top Overlay "GND" at 183.366,156.281 h0.82 r180; Top Overlay "CLK" at 198.866,156.281 h0.82 r180; Top Overlay "MOSI" at 193.866,156.281 h0.82 r180; Top Overlay "MO" at 195.866,156.281 h0.82 r180
U16: Top Overlay "3" at 255.345,131.216 h0.82 r270; Top Overlay "1" at 255.345,135.788 h0.82 r270
U19: Top Overlay "3" at 255.345,113.944 h0.82 r270; Top Overlay "1" at 255.345,118.516 h0.82 r270